# Altium PCB project_team_result.PcbDoc
Units mm, origin at the board's own origin, x right, y up, seen from the top; angles counter-clockwise.
Board outline 67.18 x 44.7 mm, 2 copper layers (Top Layer, Bottom Layer); 15 components, 15 nets, 104 pads, 0 vias.
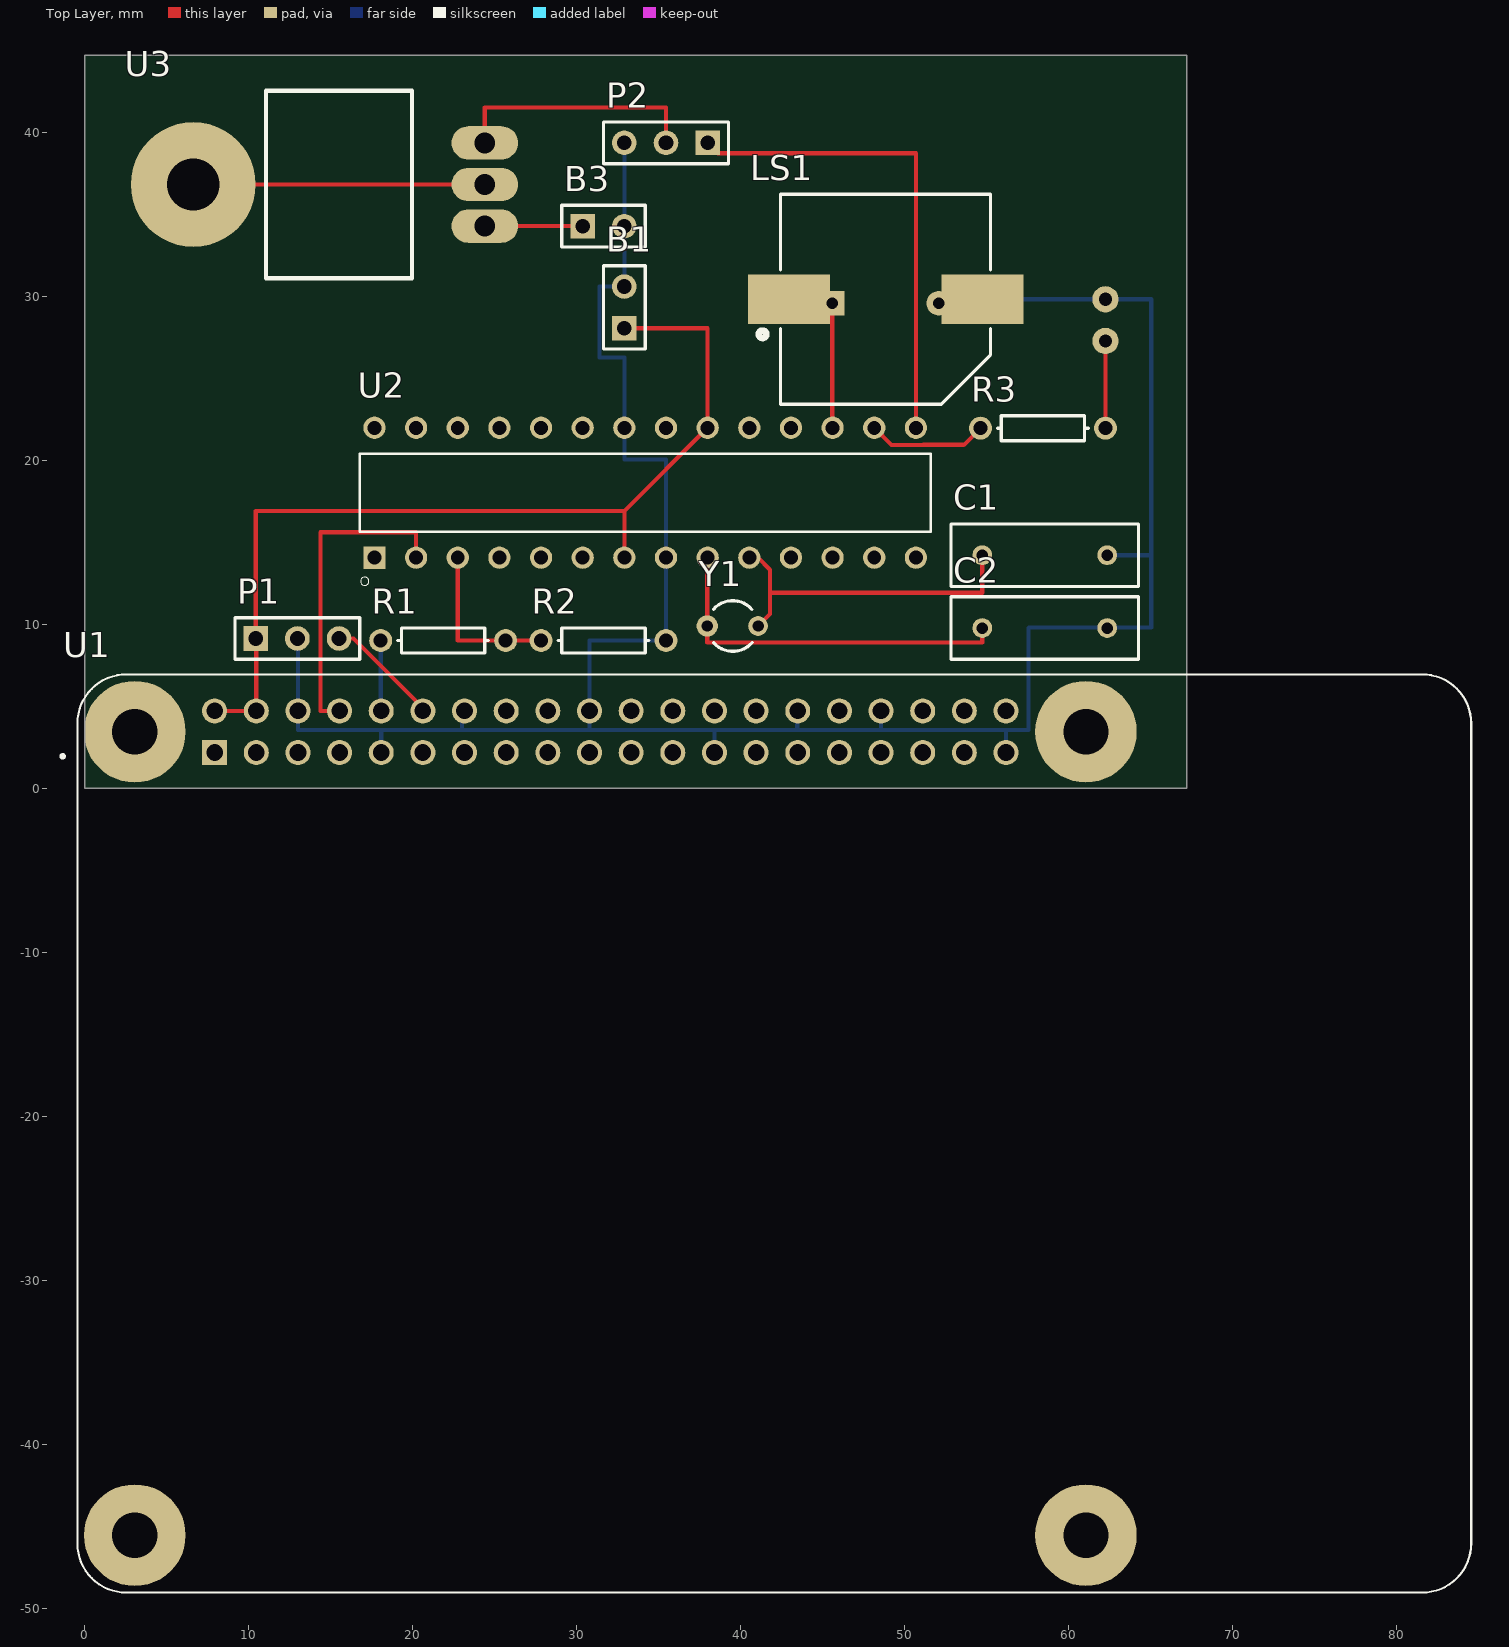
[diagram p0: Top Layer view]
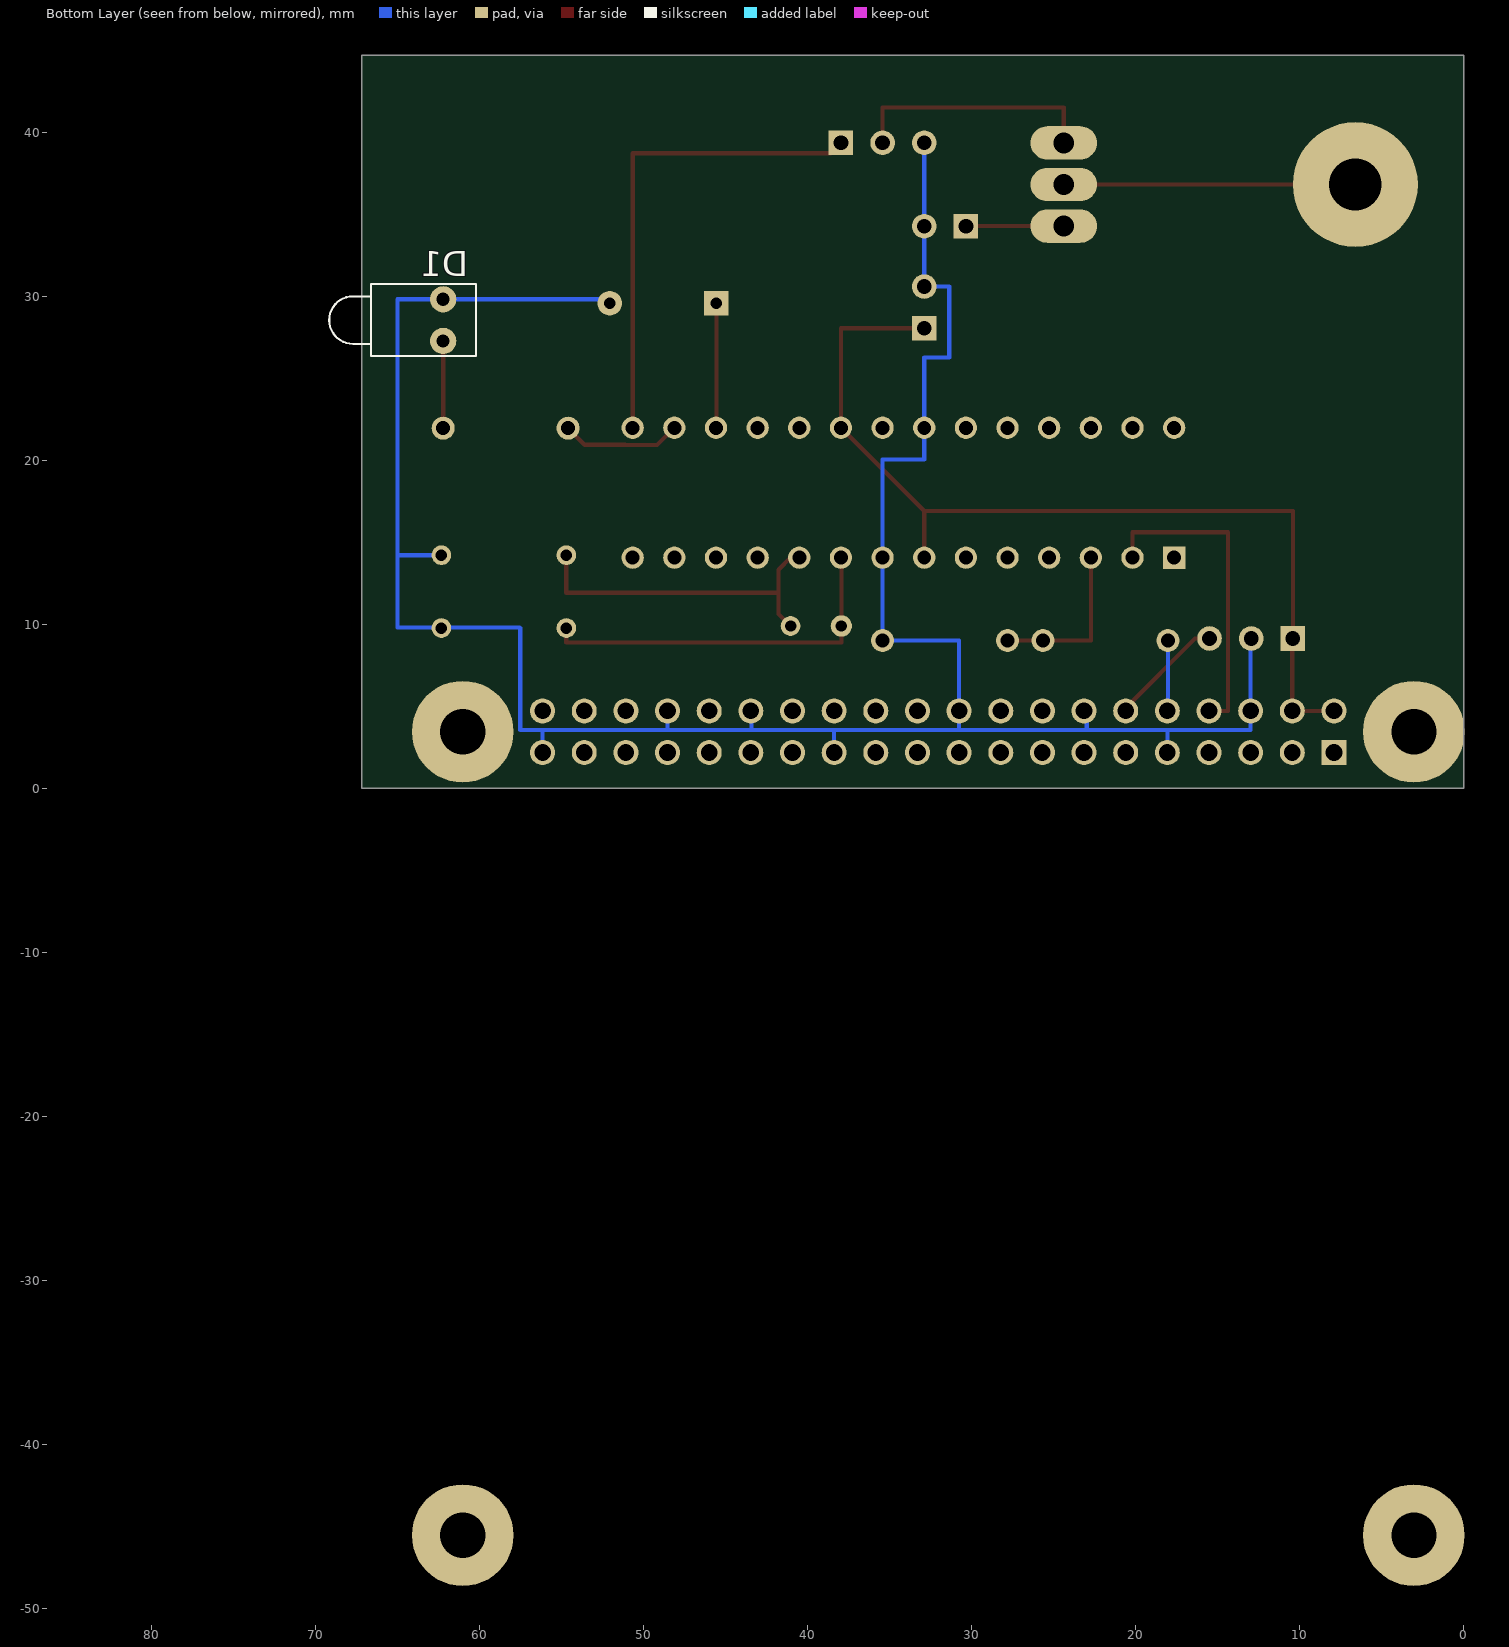
[diagram p1: Bottom Layer view, seen from below]

## Layer stack, top to bottom
Top Solder: solder mask 0.0102, Solder Resist, Dk 3.5
Top Layer: signal copper 0.0356
Dielectric 1: dielectric 0.32, FR-4, Dk 4.8
Bottom Layer: signal copper 0.0356
Bottom Solder: solder mask 0.0102, Solder Resist, Dk 3.5

## Board outline
0,0 0,44.704 67.183,44.704 67.183,0

## Design rules (kind name [scope] priority, off if disabled: settings)
Clearance [All] p1: gap=0.254 ignorepadtopadclearanceinfootprint=FALSE except(0: Arc-Hole Track-Hole SMDPad-Hole THPad-Hole Via-Hole Fill-Hole Poly-Hole Region-Hole Text-Hole)
HoleSize [All] p1: absolutevalues=TRUE maxlimit=2.75 minlimit=0.025 maxpercent=80.000 minpercent=20.000
HoleToHoleClearance [All] p1: gap=0.1 allowstackedmicrovias=TRUE
MinimumSolderMaskSliver [All] p1: minsoldermaskwidth=0.1
PolygonConnect [All] p1: connectstyle=Relief reliefconductorwidth=0.254 reliefentries=4 polygonreliefangle="90 Angle" airgapwidth=0.254
RoutingVias [All] p1: holewidth=0.3 width=0.5 viastyle="Through Hole" minholewidth=0.3 minwidth=0.5 maxholewidth=0.8 maxwidth=1
SilkToSilkClearance [All] p1: silktosilkclearance=0.1
SilkToSolderMaskClearance [IsPad] p1: minsilkscreentomaskgap=0.1 clearancetoexposedcopper=TRUE
SolderMaskExpansion [All] p1: expansion=0.102
Width [All] p1: maxlimit=0.254 minlimit=0.254 preferedwidth=0.254
25 further rules are at their usual default settings.

## Classes and differential pairs
component class project_team: B1 B3 C1 C2 D1 LS1 P1 P2 R1 R2 R3 U1 U2 Y1

## Components (designator, comment, footprint, x,y, rotation, side; value= is the part's Value field where it differs from the comment)
B1 "Battery" HDR1X2 32.893,28.067 r90 top
B3 "Header 2" HDR1X2 30.353,34.29 r0 top
C1 "Cap" RAD-0.3 58.53,14.224 r0 top value=100pF
C2 "Cap" RAD-0.3 58.53,9.779 r180 top value=100pF
D1 "LED1" LED-1 62.23,28.561 r0 bottom
LS1 "Buzzer" ABSM-1574 42.92,29.831 r0 top
P1 "DHT11" HDR1X3 10.414,9.144 r0 top
P2 "servo motor" HDR1X3 37.973,39.37 r180 top
R1 "Res1" AXIAL-0.3 21.844,9.017 r180 top value=1K
R2 "Res1" AXIAL-0.3 31.623,9.017 r0 top value=1K
R3 "Res1" AXIAL-0.3 58.42,21.971 r180 top value=220
U1 "RASPBERRYPI4_4GB" MODULE_RASPBERRYPI4_4GB 42.037,-21.041 r0 top
U2 "ATMEGA328P-PU" DIP794W46P254L2967H457Q28B 34.163,18.034 r90 top
U3 "LM7805ACT" TO-220 12.954,36.83 r90 top
Y1 "XTAL" R38 39.497,9.906 r90 top

## Footprints (in the part's own frame and the unit in brackets; to place one, negate y for a bottom-side part, rotate by r counter-clockwise, add the part's x,y. Pads: shape width x height; smd on the part's side, far side on the other; paste and mask are expansions set on the pad)
ABSM-1574 [mm] "Magnetic Transducer Buzzer"
  rect 5x3 smd: 1(0,0) 2(11.8,0)
  rect 1.5x1.5 hole 0.7: 1A(2.65,-0.24)
  round 1.5 hole 0.7: 2A(9.15,-0.24)
  silkscreen extent -1.83,-6.4 12.3,6.4
AXIAL-0.3 [mm] "Axial Device, Thru-Hole; 2 Leads; 0.3 in Pin Spacing"
  round 1.4 hole 0.85: 1(-3.81,0) 2(3.81,0)
  silkscreen extent -2.77,-0.76 2.77,0.76
DIP794W46P254L2967H457Q28B [mm]
  rect 1.358x1.358 hole 0.85: 1(-3.96,16.51)
  round 1.358 hole 0.85: 2(-3.96,13.97) 3(-3.96,11.43) 4(-3.96,8.89) 5(-3.96,6.35) 6(-3.96,3.81) 7(-3.96,1.27) 8(-3.96,-1.27) 9(-3.96,-3.81) 10(-3.96,-6.35) 11(-3.96,-8.89) 12(-3.96,-11.43) 13(-3.96,-13.97) 14(-3.96,-16.51) 15(3.96,-16.51) 16(3.96,-13.97) 17(3.96,-11.43) 18(3.96,-8.89) 19(3.96,-6.35) 20(3.96,-3.81) 21(3.96,-1.27) 22(3.96,1.27) 23(3.96,3.81) 24(3.96,6.35) 25(3.96,8.89) 26(3.96,11.43) 27(3.96,13.97) 28(3.96,16.51)
  silkscreen extent -5.65,-17.4 2.38,17.4
HDR1X2 [mm] "Connector; Header; 2 Position"
  rect 1.5x1.5 hole 0.9: 1(0,0)
  round 1.5 hole 0.9: 2(2.54,0)
  silkscreen extent -1.27,-1.27 3.81,1.27
HDR1X3 [mm] "Connector; Header; 3 Position"
  rect 1.5x1.5 hole 0.9: 1(0,0)
  round 1.5 hole 0.9: 2(2.54,0) 3(5.08,0)
  silkscreen extent -1.27,-1.27 6.35,1.27
LED-1 [mm] "LED; 2 Leads"
  round 1.6 hole 0.8: 1(0,1.27) 2(0,-1.27)
  silkscreen extent -2,-2.2 6.95,2.2
MODULE_RASPBERRYPI4_4GB [mil]
  rect 60x60 hole 40: 1(-1343.7,914.57)
  round 60 hole 40: 2(-1343.7,1014.57) 3(-1243.7,914.57) 4(-1243.7,1014.57) 5(-1143.7,914.57) 6(-1143.7,1014.57) 7(-1043.7,914.57) 8(-1043.7,1014.57) 9(-943.7,914.57) 10(-943.7,1014.57) 11(-843.7,914.57) 12(-843.7,1014.57) 13(-743.7,914.57) 14(-743.7,1014.57) 15(-643.7,914.57) 16(-643.7,1014.57) 17(-543.7,914.57) 18(-543.7,1014.57) 19(-443.7,914.57) 20(-443.7,1014.57) 21(-343.7,914.57) 22(-343.7,1014.57) 23(-243.7,914.57) 24(-243.7,1014.57) 25(-143.7,914.57) 26(-143.7,1014.57) 27(-43.7,914.57) 28(-43.7,1014.57) 29(56.3,914.57) 30(56.3,1014.57) 31(156.3,914.57) 32(156.3,1014.57) 33(256.3,914.57) 34(256.3,1014.57) 35(356.3,914.57) 36(356.3,1014.57) 37(456.3,914.57) 38(456.3,1014.57) 39(556.3,914.57) 40(556.3,1014.57)
  round 244.09 hole 108.27: S1(-1535.43,964.57) S2(748.03,964.57) S3(748.03,-964.57) S4(-1535.43,-964.57)
  silkscreen extent -1713,-1102 1673,1102
R38 [mm] "Crystal, Thru-Hole; 2 Leads; Body 3.1 x 8.2 mm (Dia.xH)"
  round 1.3 hole 0.7: 1(0,1.55)
  round 1.2 hole 0.7: 2(0,-1.55)
  silkscreen extent -1.55,-1.19 1.55,1.17
RAD-0.3 [mm] "Radial Cap, Thru-Hole; 2 Leads; 0.3 in Pin Spacing"
  round 1.2 hole 0.7: 1(-3.81,0) 2(3.81,0)
  silkscreen extent -5.71,-1.91 5.71,1.91
TO-220 [mil]
  oval 80x160 hole 50: 1(-100,-450) 2(0,-450) 3(100,-450)
  round 300 hole 126: HEAT(0,250)
  silkscreen extent -225,-275 225,75

## Part data
B1: library part "Header 2", "Header, 2-Pin", LatestRevisionDate=17-Jul-2002, LatestRevisionNote="Re-released for DXP Platform.", Publisher="Altium Limited"
B3: "Header, 2-Pin", LatestRevisionDate=17-Jul-2002, LatestRevisionNote="Re-released for DXP Platform.", Publisher="Altium Limited"
C1 C2: "Capacitor", LatestRevisionDate=17-Jul-2002, LatestRevisionNote="Re-released for DXP Platform.", PackageDescription="Radial Cap, Thru-Hole; 2 Leads; 0.3 in Pin Spacing", PackageReference=RAD-0.3, Published=8-Jun-2000, Publisher="Altium Limited"
D1: "Typical RED GaAs LED", LatestRevisionDate=08-Jul-2005, LatestRevisionNote="Mech Layer 1 removed.", PackageDescription="LED; 2 Leads", PackageReference=LED-1, Published=8-Jun-2000, Publisher="Altium Limited"
LS1: "Magnetic Transducer Buzzer", ComponentLink1Description="Manufacturer Link", ComponentLink1URL=http://www.megastar.com/linecard/buzzmode/index.php, DatasheetVersion=17-Dec-2003, LatestRevisionDate=17-Dec-2003, LatestRevisionNote="Schematic revised, PCB Footprint replaced.", PackageDescription="Magnetic Transducer Buzzer", PackageReference=ABSM-1574, Published=24-Mar-1999, Publisher="Altium Limited"
P1 P2: library part "Header 3", "Header, 3-Pin", LatestRevisionDate=17-Jul-2002, LatestRevisionNote="Re-released for DXP Platform.", Publisher="Altium Limited"
R1 R2 R3: "Resistor", LatestRevisionDate=17-Jul-2002, LatestRevisionNote="Re-released for DXP Platform.", PackageDescription="Axial Device, Thru-Hole; 2 Leads; 0.3 in Pin Spacing", PackageReference=AXIAL-0.3, Published=8-Jun-2000, Publisher="Altium Limited"
U1: "BCM2711 Raspberry Pi 4 Model B 4GB - ARMA㈢ CortexA㈢-A72 MPU Embedded Evaluation Board", Package=None, Availability=Unavailable, BuyPart=https://www.snapeda.com/parts/RASPBERRYPI4%204GB/Raspberry%20Pi/view-part/3832294/?ref=eda, MF="Raspberry Pi Foundation (NF)", MP="RASPBERRYPI4 4GB", Price=None, SnapEDA_Link=https://www.snapeda.com/parts/RASPBERRYPI4%204GB/Raspberry%20Pi/view-part/3832294/?ref=snap
U2: "AVR AVRA㈢ ATmega Microcontroller IC 8-Bit 20MHz 32KB _16K x 16_ FLASH 28-PDIP", Package="PDIP-28 Atmel", Availability=Unavailable, MF=Microchip, MP=ATMEGA328P-PU, Price=None, SnapEDA_Link=https://www.snapeda.com/parts/ATMEGA328P-PU/Microchip/view-part/44282/?ref=snap
U3: library part PMIC-LM7805ACT(TO-220), "Linear Voltage Regulator IC 1 Output 1A TO-220-3", Package="TO-220 ON Semiconductor", Availability=Unavailable, MF="ON Semiconductor", MP=LM7805ACT, Price=None, SnapEDA_Link=https://www.snapeda.com/parts/LM7805ACT/ON%20Semiconductor/view-part/1402456/?ref=snap
Y1: "Crystal Oscillator", LatestRevisionDate=17-Jul-2002, LatestRevisionNote="Re-released for DXP Platform.", PackageDescription="Crystal, Thru-Hole; 2 Leads; Body 3.1 x 8.2 mm (Dia.xH)", PackageReference=R38, Published=8-Jun-2000, Publisher="Altium Limited"

## Nets (pads, with @x,y where several pads share a name; then routed paths per layer and width w, separated by ;. In a path a pad name is that pad's centre, name@x,y a point inside that pad or via, vN(x,y) a via of type N, cw(c..) or ccw(c..) an arc to the next point about the centre after c; other vN are vias at no path point)
5V_PWR: B1.1 P1.1 U1.2 U1.4 U2.7 U2.20 | length 58.4
  Top Layer w0.254: U1.2 U1.4 10.447,9.111 P1.1 10.414,16.914 32.893,16.914 ; U2.7 32.893,16.914 ; B1.1 37.973,28.067 U2.20 32.893,16.914
7V4: B3.1 U3.1 | length 6
  Top Layer w0.254: U3.1 B3.1
GND14: B1.2 B3.2 C1.2 C2.1 D1.2 LS1.2 LS1.2A P1.2 P2.3 R2.2 U1.6 U1.9 U1.14 U1.20 U1.25 U1.30 U1.34 U1.39 U2.8 U2.22 | length 153.7
  Bottom Layer w0.254: P1.2 12.987,9.144 U1.6 12.987,3.556 18.067,3.556 ; U1.9 18.067,3.556 ; U1.14 22.987,4.729 22.987,3.556 ; P2.3 B3.2 B1.2 31.369,30.607 31.369,26.289 32.893,26.289 U2.22 32.893,20.066 35.433,20.066 U2.8 R2.2 30.767,9.017 U1.20 30.767,3.556 ; U1.25 38.387,3.556 ; U1.30 43.434,4.729 43.434,3.556 ; U1.34 48.547,3.556 ; LS1.2A 52.07,29.831 D1.2 65.024,29.831 65.024,14.224 ; U1.39 56.167,3.556 ; C1.2 65.024,14.224 ; 18.067,3.556 22.987,3.556 ; 22.987,3.556 30.767,3.556 ; 30.767,3.556 38.387,3.556 ; 38.387,3.556 43.434,3.556 ; 43.434,3.556 48.547,3.556 ; 48.547,3.556 56.167,3.556 ; 56.167,3.556 57.531,3.556 57.531,9.779 57.576,9.824 65.024,9.824 65.024,14.224
NetD1_1: D1.1 R3.1 | length 5.3
  Top Layer w0.254: R3.1 D1.1
NetLS1_1: LS1.1 LS1.1A U2.17 | length 7.6
  Top Layer w0.254: LS1.1A 45.57,22.017 U2.17
NetP1_3: P1.3 U1.12 | length 7.1
  Top Layer w0.254: P1.3 16.378,9.144 20.607,4.915 U1.12
NetP2_2: P2.2 U3.3 | length 15.4
  Top Layer w0.254: U3.3 24.384,41.529 35.433,41.529 P2.2
NetR1_1: R1.1 R2.1 U2.3 | length 10.1
  Top Layer w0.254: U2.3 22.733,9.017 R1.1 R2.1
NetR1_2: R1.2 U1.10 | length 4.3
  Top Layer w0.254: U1.10@18.034,4.762 U1.10
  Bottom Layer w0.254: R1.2 18.034,4.762 U1.10
NetR3_2: R3.2 U2.16 | length 7.3
  Top Layer w0.254: U2.16 49.193,20.934 51.112,20.934 51.133,20.955 53.594,20.955 R3.2
NetU1_8: U1.8 U2.2 | length 19.4
  Top Layer w0.254: U1.8 14.363,4.729 14.363,15.621 20.193,15.621 U2.2
NetU3_2: U3.2 U3.HEAT | length 17.8
  Top Layer w0.254: U3.HEAT U3.2
PB1: P2.1 U2.15 | length 29.7
  Top Layer w0.254: P2.1 38.608,38.735 50.673,38.735 U2.15
PB6: C2.2 U2.9 Y1.1 | length 22.9
  Top Layer w0.254: U2.9 37.947,14.074 Y1.1 37.947,8.89 54.72,8.89 C2.2
PB7: C1.1 U2.10 Y1.2 | length 20.5
  Top Layer w0.254: U2.10 41.044,14.074 41.783,13.335 41.783,11.938 ; Y1.2 41.783,10.642 41.783,11.938 ; C1.1 54.72,11.938 41.783,11.938
pads on no net: U1.1 U1.3 U1.5 U1.7 U1.11 U1.13 U1.15 U1.16 U1.17 U1.18 U1.19 U1.21 U1.22 U1.23 U1.24 U1.26 U1.27 U1.28 U1.29 U1.31 U1.32 U1.33 U1.35 U1.36 U1.37 U1.38 U1.40 U1.S1 U1.S2 U1.S3 U1.S4 U2.1 U2.4 U2.5 U2.6 U2.11 U2.12 U2.13 U2.14 U2.18 U2.19 U2.21 U2.23 U2.24 U2.25 U2.26 U2.27 U2.28